# Altium PCB Temp_sense_Project 2.0(right angle.PcbDoc (part 2 of 5)
Units mm, origin at the board's own origin, x right, y up, seen from the top; angles counter-clockwise.
Board outline 238.12 x 109.47 mm, 4 copper layers (Top Layer, Layer 1, Layer 2, Bottom Layer), stack 0.603 mm thick; 185 components, 161 nets, 944 pads, 283 vias.
Unrouted connection lines stored in the file: 2.
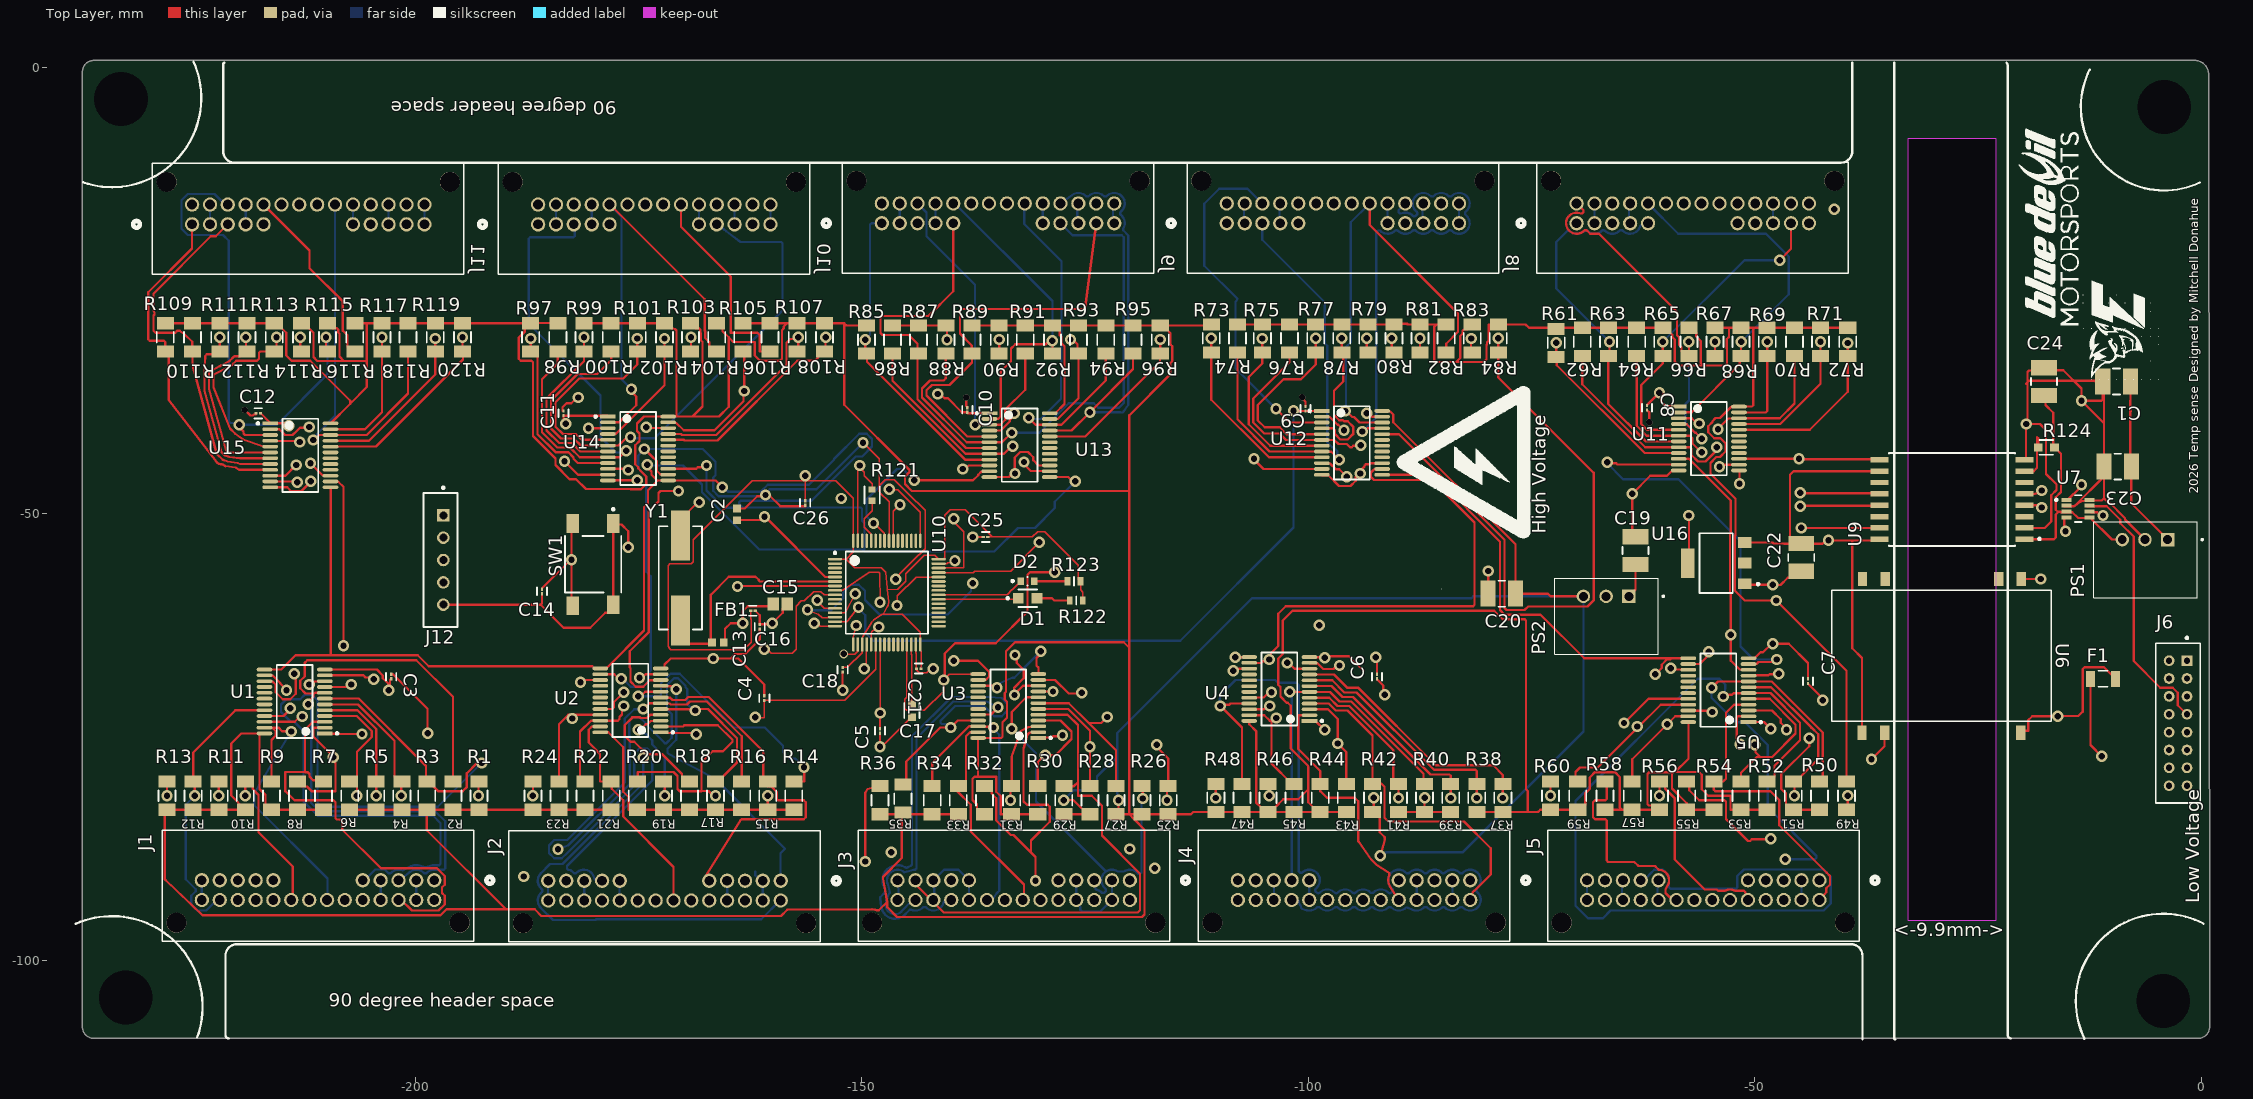
[diagram p0: Top Layer view]

## Via types
v1: diameter 1.27, hole 0.711, Top Layer to Bottom Layer, 278 vias
v2: diameter 0.711, hole 0.711, Top Layer to Bottom Layer, 4 vias
v3: diameter 1, hole 0.711, Top Layer to Bottom Layer, 1 vias

## Nets (pads, with @x,y where several pads share a name; then routed paths per layer and width w, separated by ;. In a path a pad name is that pad's centre, name@x,y a point inside that pad or via, vN(x,y) a via of type N, cw(c..) or ccw(c..) an arc to the next point about the centre after c; other vN are vias at no path point) (continued)
GND: (continued)
  Bottom Layer w0.254: J1.24@-223.867,-93.227 J1.10@-223.867,-91.017 ; J11.2@-222.952,-17.586 J11.12@-222.952,-15.376 ; J11.4@-218.964,-17.586 J11.14@-218.964,-15.376 ; J11.6@-206.95,-17.586 J11.20@-206.95,-15.376 ; J1.14@-203.851,-93.227 J1.4@-203.851,-91.017 ; J11.8@-202.962,-17.586 J11.22@-202.962,-15.376 ; J1.12@-199.864,-93.227 J1.2@-199.864,-91.017 ; J11.10@-198.949,-17.586 J11.24@-198.949,-15.376 ; J10.2@-184.217,-17.586 J10.12@-184.217,-15.376 ; J2.22@-181.068,-93.278 J2.8@-181.068,-91.068 ; J10.4@-180.229,-17.586 J10.14@-180.229,-15.376 ; J10.6@-168.215,-17.586 J10.20@-168.215,-15.376 ; v1(-167.377,-44.586) -167.377,-47.376 -165.427,-49.327 -163.99,-49.327 ; J10.8@-164.227,-17.586 J10.22@-164.227,-15.376 ; -161.916,-90.052 -161.916,-90.458 ; J2.12@-161.078,-93.278 J2.2@-161.078,-91.322 ; J10.10@-160.214,-17.586 J10.24@-160.214,-15.376 ; J3.10@-145.99,-91.017 -145.635,-91.373 -145.635,-91.525 J3.10@-145.889,-91.525 ; J9.2@-145.736,-17.459 J9.12@-145.736,-15.249 ; J3.8@-141.977,-91.017 -140.796,-89.836 -139.17,-89.836 J3.6@-137.989,-91.017 J3.20@-137.989,-93.227 ; J9.4@-141.748,-17.459 J9.14@-141.748,-15.249 ; v1(-134.852,-69.478) -134.852,-69.11 -133.131,-68.335 -132.92,-68.335 -131.433,-66.848 -131.284,-66.699 -130.757,-66.187 v1(-129.946,-65.38) ; J9.6@-129.734,-17.459 J9.20@-129.734,-15.249 ; J3.4@-125.975,-91.017 J3.14@-125.975,-93.227 -125.975,-93.591 -125.52,-94.047 -125.52,-94.317 -125.312,-94.525 -123.285,-94.525 J3.12@-121.987,-93.227 J3.2@-121.987,-91.017 ; J4.20@-99.889,-93.227 J4.6@-99.889,-91.017 ; J8.6@-91.126,-17.459 J8.20@-91.126,-15.249 ; J8.10@-83.125,-17.459 J8.24@-83.125,-15.249 ; J5.24@-68.8,-93.227 J5.10@-68.8,-91.017 ; J7.2@-67.961,-17.459 J7.12@-67.961,-15.249 ; J7.8@-47.972,-17.459 J7.22@-47.972,-15.249 ; J5.12@-44.797,-93.227 J5.2@-44.797,-91.017 ; J2.24@-185.106,-93.227 J2.10@-185.106,-91.017 ; J2.24@-185.106,-93.227 J2.10@-185.106,-91.017 ; J2.24@-185.106,-93.227 J2.10@-185.106,-91.017 ; J2.20@-177.105,-93.227 J2.6@-177.105,-91.017 ; J2.20@-177.105,-93.227 J2.6@-177.105,-91.017 ; J2.20@-177.105,-93.227 J2.6@-177.105,-91.017 ; J2.14@-165.04,-93.532 J2.4@-165.04,-91.322 ; J2.14@-165.04,-93.532 J2.4@-165.04,-91.322 ; J2.14@-165.04,-93.532 J2.4@-165.04,-91.322 ; -161.916,-90.458 J2.2@-161.052,-91.322 ; -161.916,-90.458 J2.2@-161.052,-91.322 ; -161.916,-90.458 J2.2@-161.052,-91.322 ; J2.2@-161.078,-91.322 J2.2@-161.052,-91.322 ; J2.2@-161.078,-91.322 J2.2@-161.052,-91.322 ; J2.2@-161.078,-91.322 J2.2@-161.052,-91.322 ; J3.24@-145.889,-93.735 J3.10@-145.889,-91.525 ; J3.24@-145.889,-93.735 J3.10@-145.889,-91.525 ; J3.24@-145.889,-93.735 J3.10@-145.889,-91.525 ; J3.22@-141.875,-93.532 J3.8@-141.875,-91.525 ; J3.22@-141.875,-93.532 J3.8@-141.875,-91.525 ; J3.22@-141.875,-93.532 J3.8@-141.875,-91.525 ; J9.8@-125.873,-17.586 J9.22@-125.873,-15.376 ; J9.8@-125.873,-17.586 J9.22@-125.873,-15.376 ; J9.8@-125.873,-17.586 J9.22@-125.873,-15.376 ; J9.10@-121.86,-17.586 J9.24@-121.86,-15.376 ; J9.10@-121.86,-17.586 J9.24@-121.86,-15.376 ; J9.10@-121.86,-17.586 J9.24@-121.86,-15.376 ; J8.2@-107.204,-17.586 J8.12@-107.204,-15.376 ; J8.2@-107.204,-17.586 J8.12@-107.204,-15.376 ; J8.2@-107.204,-17.586 J8.12@-107.204,-15.376 ; J4.22@-103.852,-93.227 J4.8@-103.852,-91.22 ; J4.22@-103.852,-93.227 J4.8@-103.852,-91.22 ; J4.22@-103.852,-93.227 J4.8@-103.852,-91.22 ; J8.4@-103.217,-17.586 J8.14@-103.217,-15.376 ; J8.4@-103.217,-17.586 J8.14@-103.217,-15.376 ; J8.4@-103.217,-17.586 J8.14@-103.217,-15.376 ; J4.14@-87.85,-93.227 J4.4@-87.85,-91.22 ; J4.14@-87.85,-93.227 J4.4@-87.85,-91.22 ; J4.14@-87.85,-93.227 J4.4@-87.85,-91.22 ; J8.8@-87.215,-17.586 J8.22@-87.215,-15.376 ; J8.8@-87.215,-17.586 J8.22@-87.215,-15.376 ; J8.8@-87.215,-17.586 J8.22@-87.215,-15.376 ; J4.12@-83.862,-93.227 J4.2@-83.862,-91.22 ; J4.12@-83.862,-93.227 J4.2@-83.862,-91.22 ; J4.12@-83.862,-93.227 J4.2@-83.862,-91.22 ; J5.22@-64.888,-93.278 J5.8@-64.888,-91.068 ; J5.22@-64.888,-93.278 J5.8@-64.888,-91.068 ; J5.22@-64.888,-93.278 J5.8@-64.888,-91.068 ; J7.4@-64.101,-17.586 J7.14@-64.101,-15.376 ; J7.4@-64.101,-17.586 J7.14@-64.101,-15.376 ; J7.4@-64.101,-17.586 J7.14@-64.101,-15.376 ; J5.20@-60.9,-93.227 J5.6@-60.9,-91.068 ; J5.20@-60.9,-93.227 J5.6@-60.9,-91.068 ; J5.20@-60.9,-93.227 J5.6@-60.9,-91.068
  other v1: -160.773,-47.888
LV_GND: C1.2 C23.2 C24.2 J6.13 PS1.2 U6.1 U7.2 U7.8 U9.2 U9.8 | length 160.3
  Top Layer w0.254: U6.1@-20.184,-57.286 v1(-18.025,-57.286) ; U9.2@-19.809,-51.571 -17.558,-51.571 -16.827,-50.84 -16.827,-47.915 -16.247,-47.335 -16.247,-46.69 -17.409,-45.528 -17.409,-40.63 -18.101,-39.938 v1@-19.498,-39.938 ; U9.8@-19.809,-43.951 -19.651,-43.793 v1@-19.651,-40.09 ; v1(-19.651,-39.938) -19.574,-39.938 v1@-19.498,-39.938 ; -19.651,-35.442 -19.295,-35.086 -12.005,-35.086 -10.938,-36.153 -10.938,-45.81 -14.215,-49.087 ; PS1.2@-6.341,-52.877 -8.58,-50.638 -8.58,-50.479 -10.409,-48.65 -10.568,-48.65 -10.939,-48.279 ; v1@-19.651,-40.09 v1@-19.574,-40.014 ; v1@-19.651,-40.09 v1@-19.574,-40.014 ; v1@-19.651,-40.09 v1@-19.574,-40.014 ; v1@-19.498,-39.938 -19.498,-34.121 ; v1@-19.498,-39.938 -19.498,-34.121 ; v1@-19.498,-39.938 -19.498,-34.121 ; -19.498,-34.121 -19.328,-33.951 -17.957,-33.951 C24.2@-17.644,-33.638 -17.465,-33.638 -17.185,-33.918 -15.485,-33.918 ; -15.485,-33.918 -13.453,-35.95 ; -15.485,-33.918 -13.453,-35.95 ; U7.2@-15.388,-49.158 -14.357,-49.158 ; U7.2@-15.388,-49.158 -14.357,-49.158 ; U7.2@-15.388,-49.158 -14.357,-49.158 ; -14.357,-49.158 ccw(c-14.357,-48.904) -14.205,-49.107 ; -14.357,-49.158 ccw(c-14.357,-48.904) -14.205,-49.107 ; -14.357,-49.158 ccw(c-14.357,-48.904) -14.205,-49.107 ; -14.205,-49.107 -13.567,-48.628 ; -14.205,-49.107 -13.567,-48.628 ; -14.205,-49.107 -13.567,-48.628 ; -13.567,-48.628 cw(c-13.338,-48.933) -13.338,-48.552 ; -13.567,-48.628 cw(c-13.338,-48.933) -13.338,-48.552 ; -13.567,-48.628 cw(c-13.338,-48.933) -13.338,-48.552 ; v1(-13.453,-37.347) -13.453,-35.95 ; v1(-13.453,-37.347) -11.215,-37.347 -11.066,-37.198 ; v1(-13.453,-37.347) -10.939,-39.861 C23.2@-10.939,-44.713 ; -13.338,-48.552 -13.211,-48.552 U7.8@-12.788,-48.508 ; U7.8@-12.788,-48.508 -11.168,-48.508 ; U7.8@-12.788,-48.508 -11.168,-48.508 ; U7.8@-12.788,-48.508 -11.168,-48.508 ; -11.168,-48.508 -10.939,-48.279 ; -11.066,-37.198 C1.2@-11.066,-35.188 -11.066,-37.198 ; -10.939,-48.279 C23.2@-10.939,-44.713 ; -10.939,-48.279 C23.2@-10.939,-44.713
  Layer 2 w0.254: v1(-18.025,-57.286) -10.75,-57.286 ; PS1.2@-6.341,-52.877 -10.75,-57.286 ; J6.13@-1.642,-78.431 -2.785,-77.288 -2.785,-76.961 -2.661,-76.837 -2.661,-76.025 -2.785,-75.901 -2.785,-74.961 -2.661,-74.837 -2.661,-74.025 -2.785,-73.901 -2.785,-72.961 -2.661,-72.837 -2.661,-72.025 -2.785,-71.901 -2.785,-70.961 -2.661,-70.837 -2.661,-70.025 -2.785,-69.901 -2.785,-68.961 -2.661,-68.837 -2.661,-68.025 -2.785,-67.901 -2.785,-66.961 -2.661,-66.837 -2.661,-66.025 -2.785,-65.901 -2.785,-57.438 -2.937,-57.286 -10.75,-57.286
NetC1_1: C1.1 C23.1 F1.2 PS1.1 U6.16 | length 90.2
  Top Layer w0.254: U6.16@-20.248,-74.507 U6.16@-20.248,-74.279 ; F1.2@-9.64,-68.462 -10.921,-67.181 -13.098,-67.181 -13.321,-67.404 -13.321,-72.143 -13.813,-72.635 -16.102,-72.635 v1(-16.12,-72.653) -18.965,-72.653 -19.422,-73.11 -19.422,-74.279 ; -7.992,-37.347 -7.992,-37.829 ; C1.1@-7.966,-35.188 -7.966,-37.855 -7.992,-37.829 ; -7.923,-38.498 -7.992,-38.43 -7.992,-37.829 ; C23.1@-7.839,-44.713 C23.1@-7.992,-44.56 ; PS1.1@-3.801,-52.877 -7.865,-48.813 ; U6.16@-20.248,-74.279 -19.422,-74.279 ; U6.16@-20.248,-74.279 -19.422,-74.279 ; U6.16@-20.248,-74.279 -19.422,-74.279 ; U6.16@-20.248,-74.279 -19.422,-74.279 ; U6.16@-20.248,-74.279 -19.422,-74.279 ; -8.003,-38.555 -7.992,-38.567 C23.1@-7.992,-44.56 ; -8.003,-38.555 -8.003,-44.548 C23.1@-7.992,-44.56 ; -8.003,-38.555 -8.003,-37.817 -7.992,-37.829 ; C23.1@-7.992,-44.56 -7.992,-44.586 C23.1@-7.865,-44.713 ; -7.865,-48.813 C23.1@-7.865,-44.713 ; -7.865,-48.813 C23.1@-7.865,-44.713 ; -7.865,-48.813 C23.1@-7.865,-44.713 ; -7.865,-48.813 C23.1@-7.865,-44.713 ; -7.865,-48.813 C23.1@-7.865,-44.713
  Layer 1 w0.254: v1(-16.12,-72.653) -14.469,-72.653 -3.801,-61.985 PS1.1@-3.801,-52.877
NetC2_1: C2.1 U10.5 Y1.2 | length 29
  Top Layer w0.254: Y1.2@-170.298,-52.409 -170.298,-50.659 -168.349,-48.71 v1(-168.199,-48.71) ; C2.1@-163.948,-50.697 -163.933,-50.682 -161.647,-50.682 -161.632,-50.697 v1@-161.239,-50.697 ; v1(-160.88,-50.301) -160.88,-50.338 v1@-161.239,-50.697 ; U10.5@-152.99,-57.066 -154.074,-57.066 v1@-160.443,-50.697 ; v1@-161.239,-50.697 -160.88,-50.697 v1@-160.443,-50.697 ; v1@-161.239,-50.697 v1@-160.443,-50.697 ; v1@-161.239,-50.697 v1@-160.443,-50.697
  Layer 2 w0.254: v1(-168.199,-48.71) -168.004,-48.515 -167.302,-48.515 -167.056,-48.269 -162.511,-48.269 -161.488,-49.292 -161.488,-49.472 -160.88,-50.08 v1(-160.88,-50.301)
NetC3_1: C3.1 U1.1 U10.21 | length 125.4
  Top Layer w0.15: U10.21@-148.94,-64.616 -148.94,-63.318 -148.928,-63.306 -148.859,-63.197 -148.803,-63.141 v1(-148.073,-62.66)
  Top Layer w0.254: U1.1@-210.103,-74.577 -210.074,-74.606 -208.503,-74.606 -208.474,-74.634 -205.945,-74.634 v1(-205.94,-74.64) ; C3.1@-202.682,-67.954 -202.473,-67.954 -198.619,-71.808 -198.619,-74.518 v1(-198.599,-74.538)
  Layer 2 w0.254: v1(-205.94,-74.64) -205.858,-74.558 -198.619,-74.558 v1(-198.599,-74.538) ; v1(-148.073,-62.66) -148.073,-62.76 -148.594,-63.282 -148.594,-63.477 -148.962,-63.845 -148.962,-71.383 -153.846,-76.267 -176.125,-76.267 -177.835,-74.558 ; v1@-198.599,-74.558 -177.835,-74.558 ; v1@-198.599,-74.558 -177.835,-74.558 ; v1@-198.599,-74.558 -177.835,-74.558

## Text inside footprints (layer, text, board x,y; h text height)
U6: Top 3D Body "*" at -18.33,-58.759 h0 r270; Top Overlay "*" at -37.773,-56.715 h0 r270